# EAGLE board panel back (EAGLE 6.5.0)
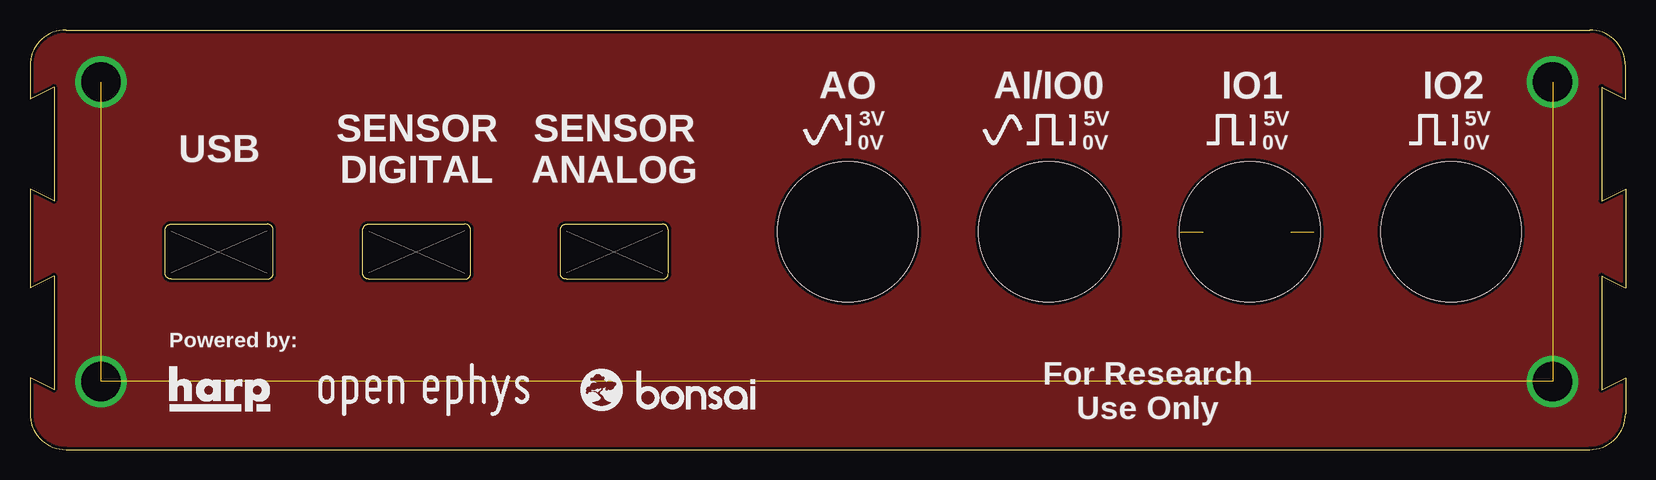
[diagram p0: board, top side]
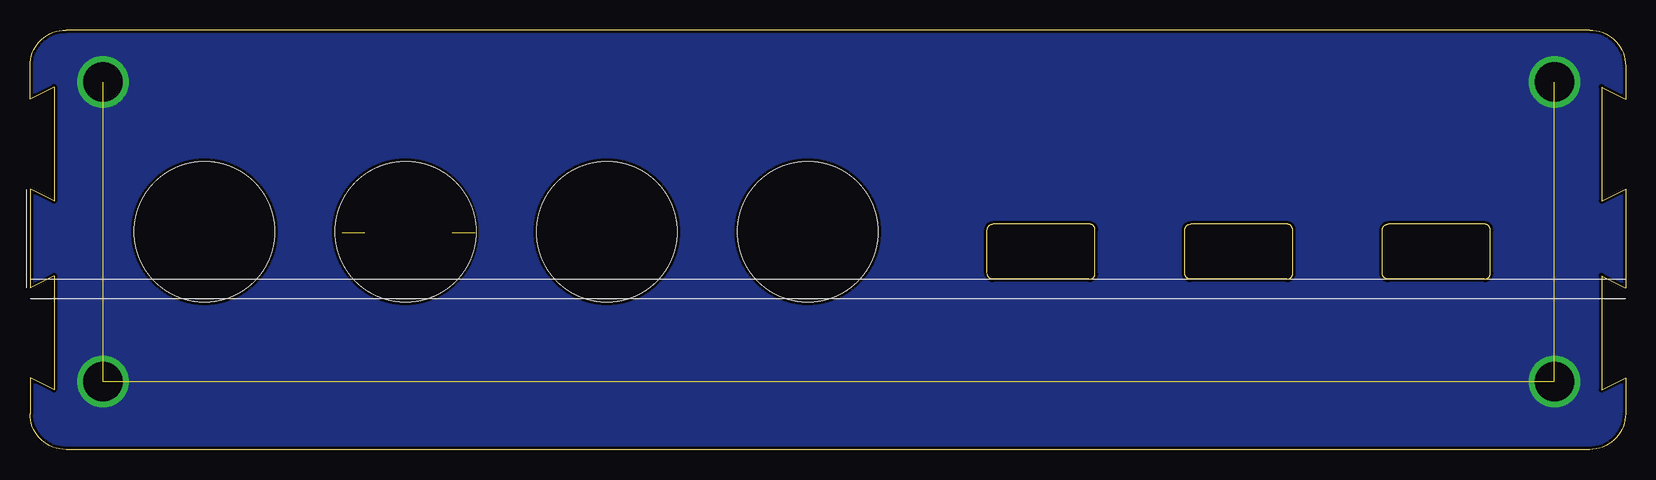
[diagram p1: board, bottom side, seen from below]

Size 133 x 35 mm. Coordinates in mm from the lower left corner, seen from the top.
Outline: 0,32 0,29.25 2,30.25 2,20.75 0,21.75 0,13.5 2,14.5 2,5 0,6 0,3 arc90 3,0 130,0 arc90 133,3 133,6 131,5 131,14.5 133,13.5 133,21.75 131,20.75 131,30.25 133,29.25 133,32 arc90 130,35 3,35 arc90 0,32
Outline: 11.77,14.21 19.77,14.21 arc90 20.27,14.71 20.27,18.31 arc90 19.77,18.81 11.77,18.81 arc90 11.27,18.31 11.27,14.71 arc90 11.77,14.21
Outline: 28.24,14.21 36.24,14.21 arc90 36.74,14.71 36.74,18.31 arc90 36.24,18.81 28.24,18.81 arc90 27.74,18.31 27.74,14.71 arc90 28.24,14.21
Outline: 44.71,14.21 52.71,14.21 arc90 53.21,14.71 53.21,18.31 arc90 52.71,18.81 44.71,18.81 arc90 44.21,18.31 44.21,14.71 arc90 44.71,14.21
Copper layers (1*16): Top 0.035mm / dielectric 1.5mm / Bottom 0.035mm
Design rules "seeed-studio-2-layer": minimum track width 6mil, minimum drill 12mil, track to track 6mil, track to pad 6mil, pad to pad 6mil, via to via 6mil, smd to smd 0mil, copper to edge 10mil, drill to drill 10mil, minimum pad ring 10mil, minimum via ring 6mil, stop-mask expansion 2mil, vias tented up to drill 100mil, thermal gap 10mil
Holes 11.7 mm at 68.16,18.18 101.69,18.18 118.45,18.18 84.92,18.18

## Placement (x,y rotation side)
U$30  OPEN_EPHYS_LOGO  [OPEN_EPHYS_LOGO]  23.43,2.35 0 top

## Library data of the parts
U$30 = open-ephys

## Tracks (layer width: path | path; a pad name or v marks a point on that pad's centre or on a via)
GND  (via drill 3.3)  (3 unrouted)
  other vias: 5.92,30.66 5.92,5.67 126.92,5.67 126.92,30.66
  pour Bottom: -2.2,-179.6 -2.2,201.1 137.8,201.1 137.8,-179.6
  pour Top: -2.2,-179.1 -2.2,201.6 137.8,201.6 137.8,-179.1
S$2  (2 unrouted)

## Text on the board
tPlace: AO | AI/IO0 | IO1 | IO2 | 3V | 5V | 5V | 5V | USB | 0V | 0V | 0V | 0V | SENSOR / DIGITAL | SENSOR / ANALOG | 4.1 mm | Powered by: | For Research / Use Only